# EAGLE board Tipper Remote Base Unit (EAGLE 9.6.2)
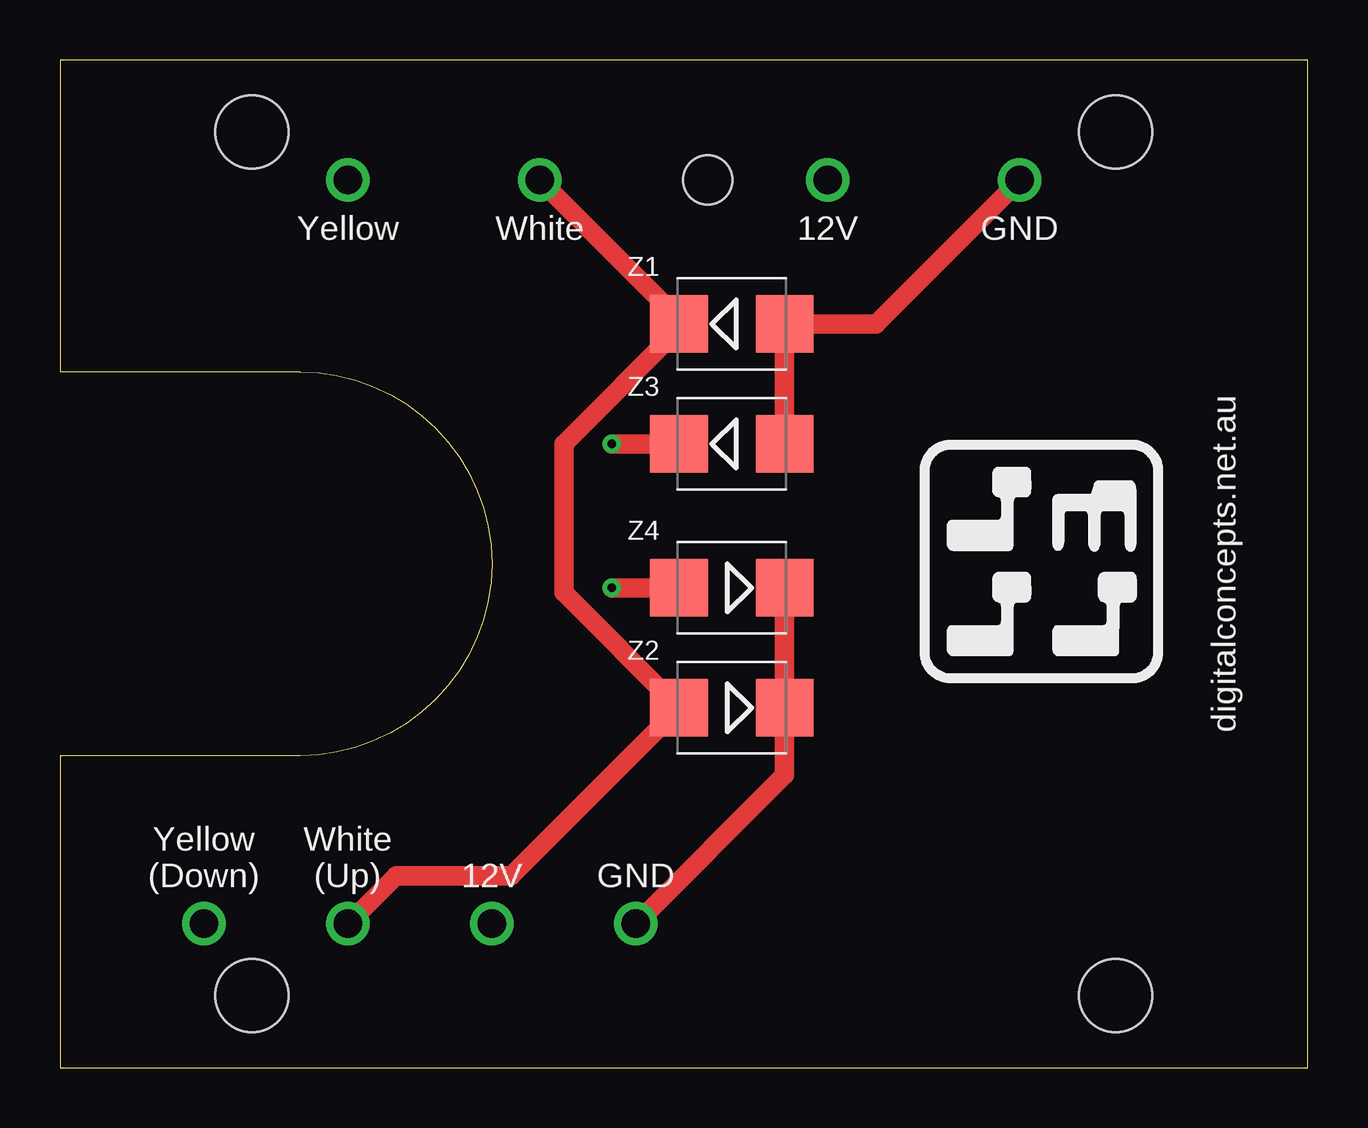
[diagram p0: board, top side]
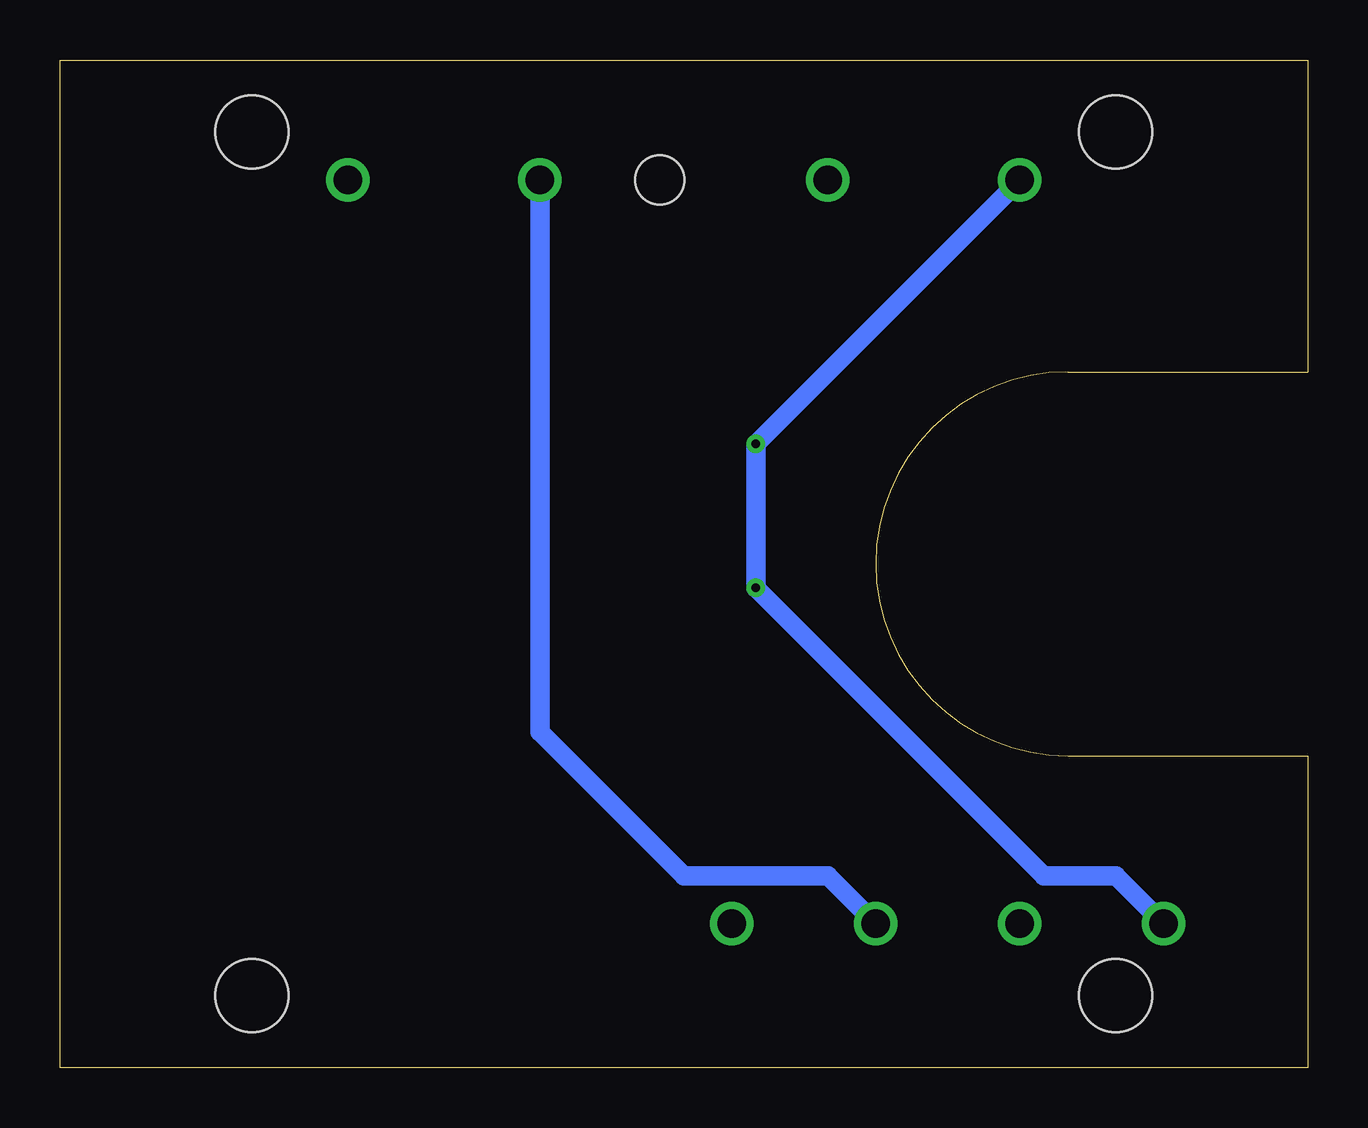
[diagram p1: board, bottom side, seen from below]

Size 52 x 42 mm. Coordinates in mm from the lower left corner, seen from the top.
Outline: 0,0 52,0 52,42 0,42 0,29 10,29 arc-180 10,13 0,13 0,0
Copper layers (1*16): Top 0.035mm / dielectric 1.5mm / Bottom 0.035mm
Design rules "default": minimum track width 6mil, minimum drill 0.35mm, track to track 6mil, track to pad 6mil, pad to pad 6mil, via to via 6mil, smd to smd 6mil, copper to edge 40mil, drill to drill 6mil, minimum pad ring 10mil, minimum via ring 8mil, stop-mask expansion 4mil, vias tented up to drill 0mil, thermal gap 10mil
Holes 2.03 mm at 27,37
Holes 3.05 mm at 44,39 44,3 8,3 8,39

## Footprints (pad centres in the part's own frame; a part is rotated, then mirrored left to right if it is on the bottom)
DIODE_SMB = smd 2.4 x 2.4: A 2.2,0; C -2.2,0

## Placement (x,y rotation side)
Z1  DIODE-SCHOTTKY-1N5822  [DIODE_SMB]  28,31 0 top
Z2  DIODE-SCHOTTKY-1N5822  [DIODE_SMB]  28,15 180 top
Z3  DIODE-SCHOTTKY-1N5822  [DIODE_SMB]  28,26 0 top
Z4  DIODE-SCHOTTKY-1N5822  [DIODE_SMB]  28,20 180 top

## Library data of the parts
Z1-Z4 = digitalconcepts

## Nets
N$1: Z1.C Z2.A
N$2: Z3.C Z4.A
N$3: Z1.A Z3.A
N$4: Z2.C Z4.C

## Tracks (layer width: path | path; a pad name or v marks a point on that pad's centre or on a via)
N$1  (via drill 1.2)
  Top 0.813: 25.8,30.8 21,26 21,19.8 Z2.A 18.8,8 14,8 v12,6 | Z1.C 25.8,31.2 v20,37
  Top 1.27: Z1.C 25.8,30.8
N$2  (via drill 0.35, 1.2)
  Top 0.813: Z4.A v23,20 | Z3.C v23,26
  Bottom 0.813: v6,6 8,8 11,8 v23,20 v23,26 v12,37
N$3  (via drill 1.2)
  Top 0.813: Z3.A Z1.A 34,31 v40,37
N$4  (via drill 1.2)
  Top 0.813: Z4.C Z2.C 30.2,12.2 v24,6
N$6  (via drill 1.2)
  Bottom 0.813: v32,37 32,14 26,8 20,8 v18,6

## Text on the board
tPlace: digitalconcepts.net.au
tNames: Yellow | White | 12V | GND | Yellow / (Down) | White / (Up) | 12V | GND